# EAGLE board potenciometro (EAGLE 9.7.0)

Size 51.79 x 56.95 mm. Coordinates in mm from the lower left corner, seen from the top.
Outline: 0,0 51.79,0 51.79,56.95 0,56.95 0,0
Copper layers (1*16): Top 0.035mm / dielectric 1.5mm / Bottom 0.035mm
Design rules "default": minimum track width 6mil, minimum drill 0.35mm, track to track 6mil, track to pad 6mil, pad to pad 6mil, via to via 6mil, smd to smd 6mil, copper to edge 40mil, drill to drill 6mil, minimum pad ring 10mil, minimum via ring 8mil, stop-mask expansion 4mil, vias tented up to drill 0mil, thermal gap 10mil

## Footprints (pad centres in the part's own frame; a part is rotated, then mirrored left to right if it is on the bottom)
BATTERY-GENERIC = drill 1.118 pad 3.15 octagon: + 2.54,0; - -2.54,0
LEDRD254W60D565H860B = drill 0.981 pad 1.581: 1 -1.27,0; 2 1.27,0
RESAD1016W63L850D250B = drill 0.83 pad 1.43: 1 -5.08,0; 2 5.08,0
HA-06-SM065 = drill 1 pad 1.676: 1 -2.54,-2.54; 2 0,2.54; 3 2.54,-2.54

## Placement (x,y rotation side)
BAT1  4.5V  [BATTERY-GENERIC]  9.12,8.26 0 top
D1  RED  [LEDRD254W60D565H860B]  6.06,48.62 180 top
D2  RED  [LEDRD254W60D565H860B]  28.15,49.04 180 top
R1  470  [RESAD1016W63L850D250B]  18.17,32.15 0 top
R2  470  [RESAD1016W63L850D250B]  38.38,32.06 0 top
RPOT1  1000  [HA-06-SM065]  44.74,37.13 0 top

## Library data of the parts
BAT1 R1 R2 RPOT1 = Tinkercad
D1 D2 = Tinkercad; CATEGORY: Opto-Electronic; SUB-CATEGORY: LED; VALUE: LED_RED

## Nets
BAT1+: BAT1.+ R2.2 RPOT1.3
BAT1-: BAT1.- D1.2 D2.2 R1.1 RPOT1.1
D1_A: D1.1 R1.2 R2.1
D2_A: D2.1 RPOT1.2

## Tracks (layer width: path | path; a pad name or v marks a point on that pad's centre or on a via)
BAT1+  (2 unrouted)
BAT1-  (4 unrouted)
D1_A  (2 unrouted)
D2_A  (1 unrouted)